# Altium PCB nanoDAP.PcbDoc
Units mm, origin at the board's own origin, x right, y up, seen from the top; angles counter-clockwise.
Board outline 70 x 40 mm, 2 copper layers (Top Layer, Bottom Layer); 25 components, 42 nets, 128 pads, 17 vias.
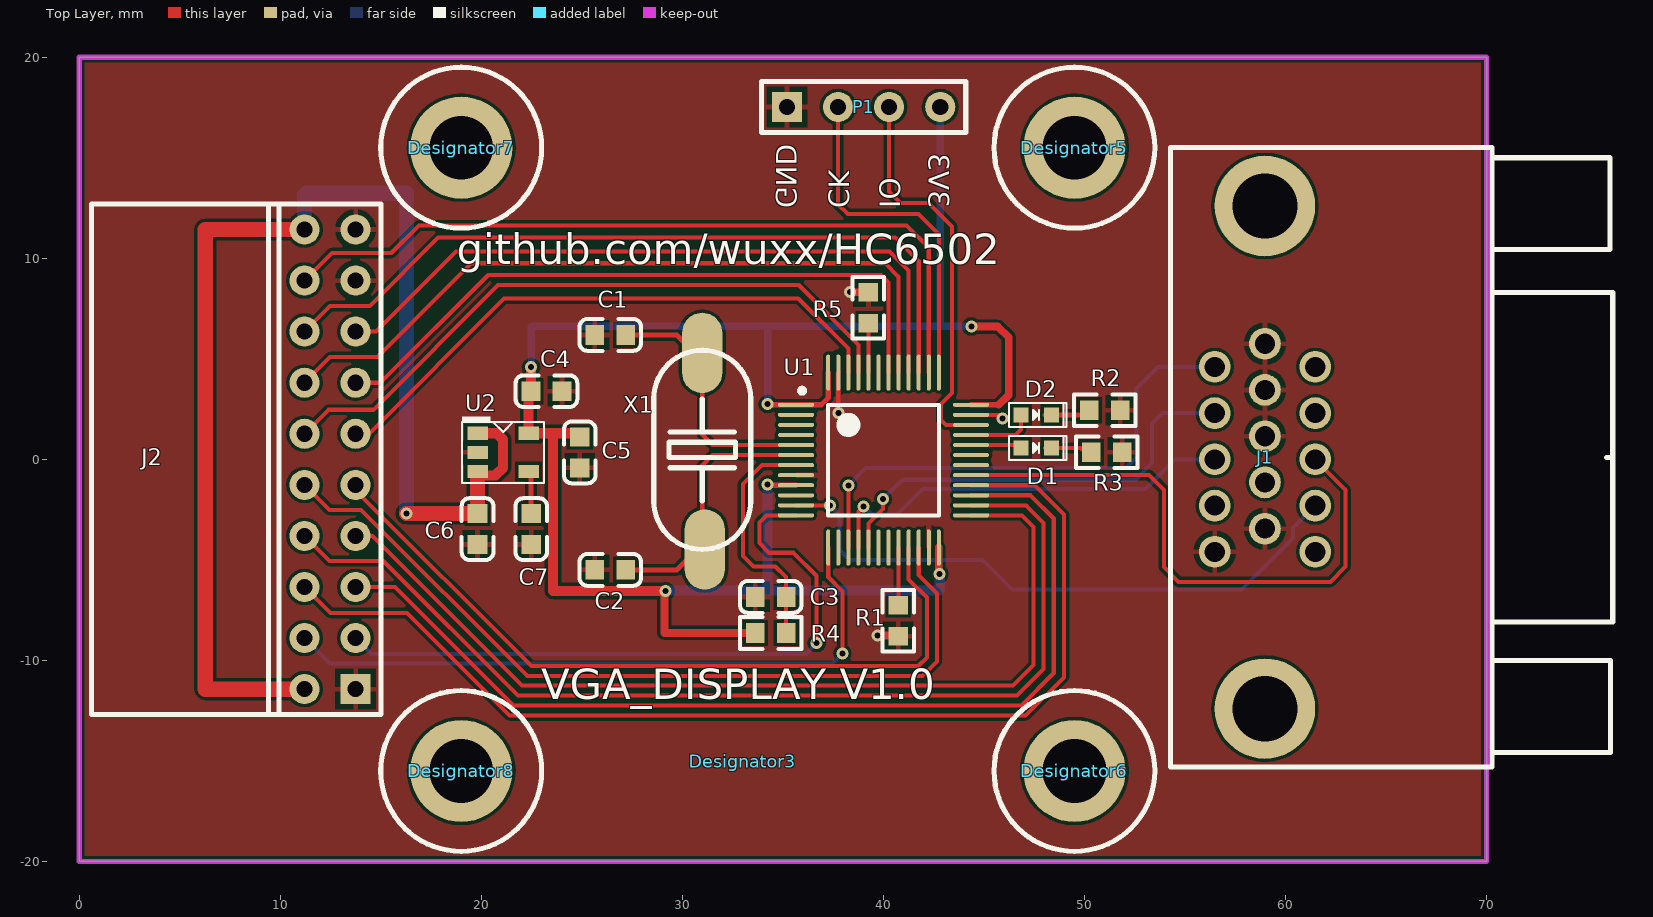
[diagram p0: Top Layer view]
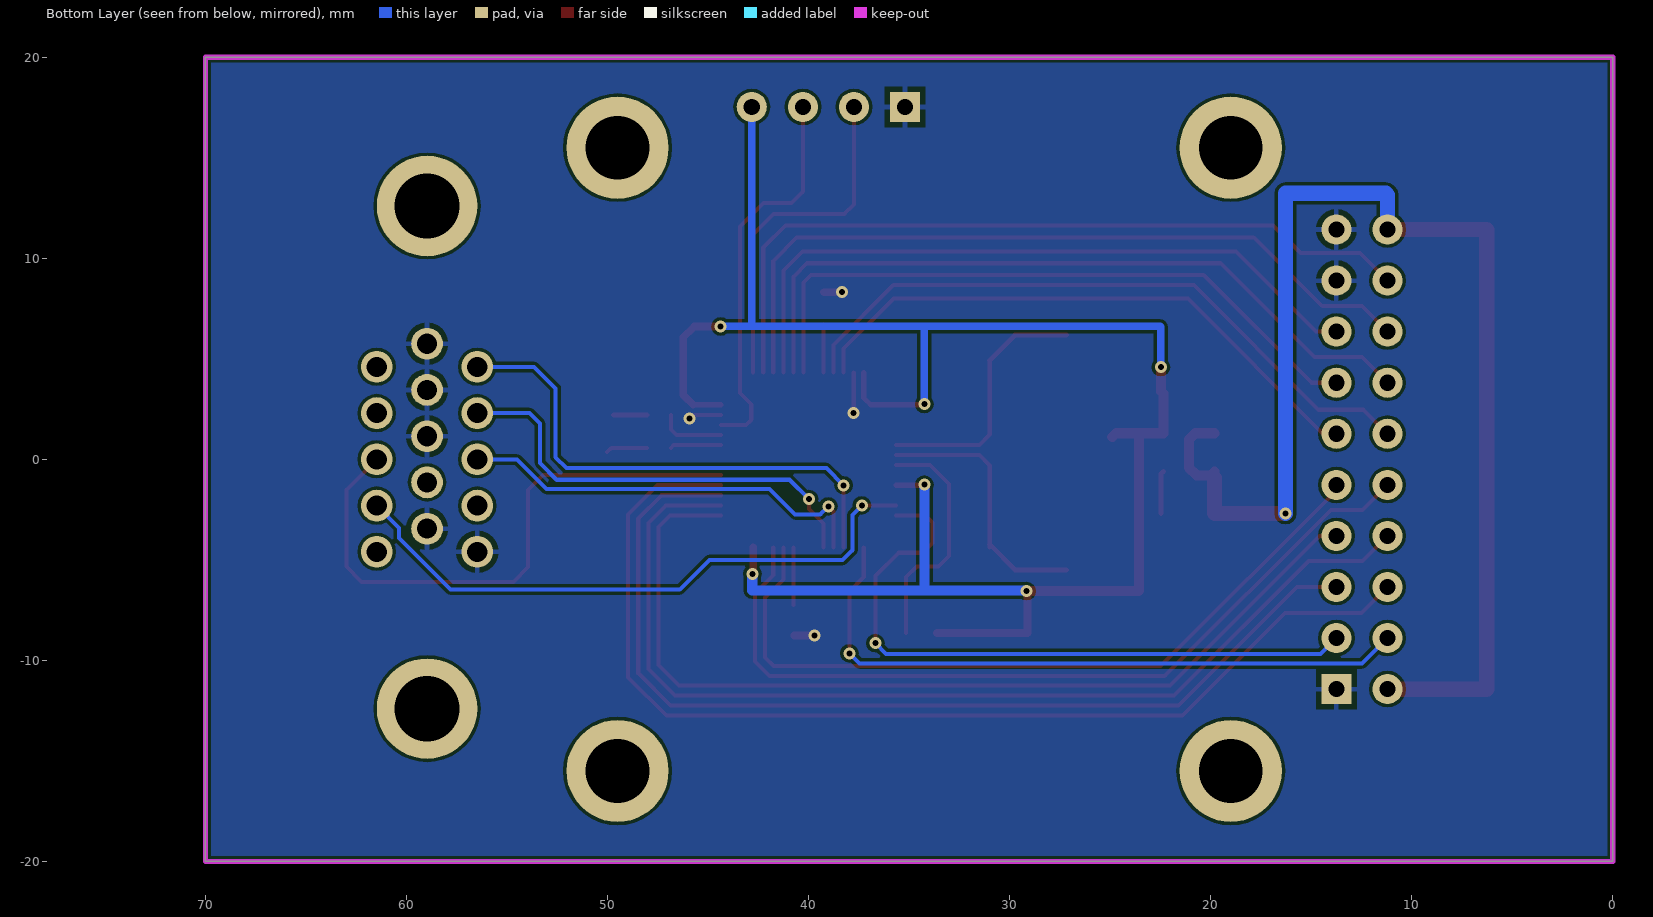
[diagram p1: Bottom Layer view, seen from below]
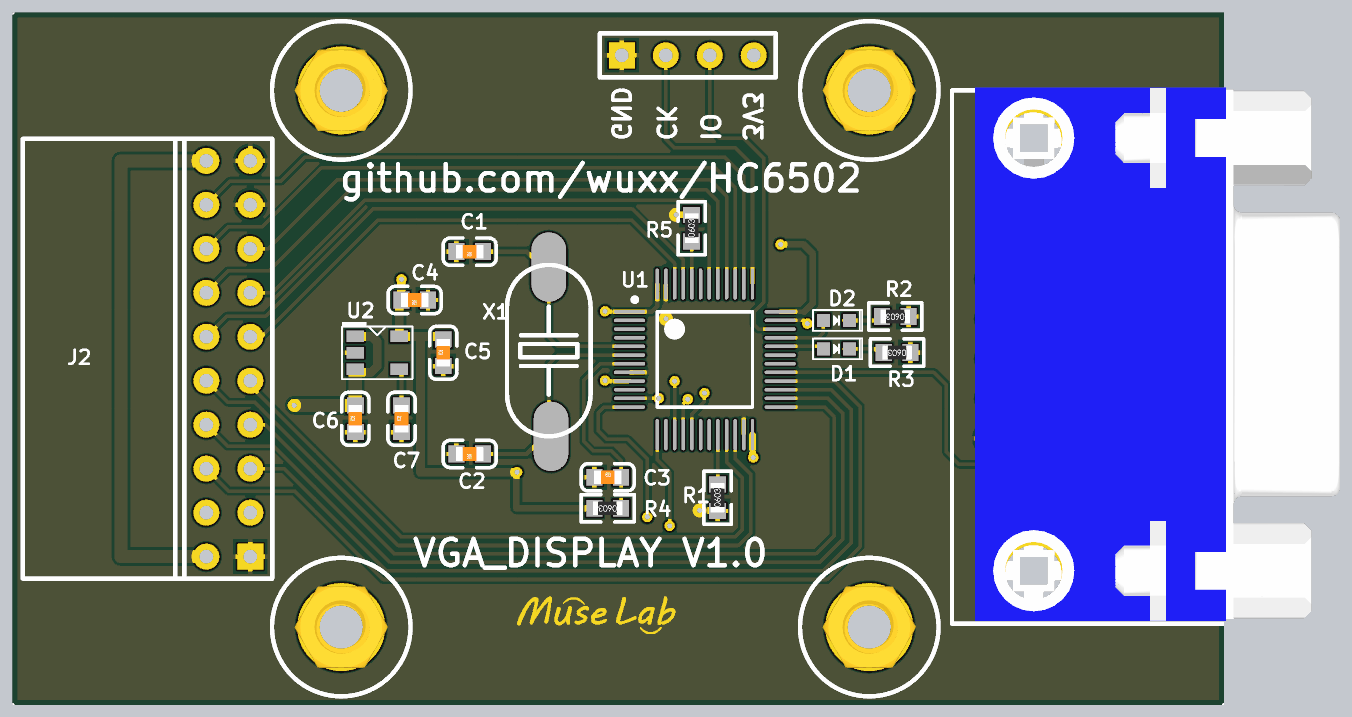
[diagram p2: 3D render of the assembled board from above, using the file's embedded part models]

## Layer stack, top to bottom
Top Solder: solder mask 0.0102, Solder Resist, Dk 3.5
Top Layer: signal copper 0.0356
Dielectric 1: dielectric 0.32, FR-4, Dk 4.8
Bottom Layer: signal copper 0.0356
Bottom Solder: solder mask 0.0102, Solder Resist, Dk 3.5

## Board outline
0,-20 70,-20 70,20 0,20

## Design rules (kind name [scope] priority, off if disabled: settings)
Clearance [All] p1: gap=0.152 ignorepadtopadclearanceinfootprint=FALSE
DiffPairsRouting [All] p1: maxlimit=0.254 minlimit=0.254 mostfreqgap=0.254 toplayer_minwidth=0.203 toplayer_maxwidth=0.381 toplayer_prefwidth=0.381 bottomlayer_minwidth=0.203 bottomlayer_maxwidth=0.381 bottomlayer_prefwidth=0.381 maxuncoupledlength=12.7
HoleSize [All] p1 off: absolutevalues=TRUE maxlimit=2.54 minlimit=0.025 maxpercent=80.000 minpercent=20.000
PolygonConnect [All] p1: thpad.connectstyle=Relief thpad.reliefconductorwidth=0.254 thpad.reliefentries=4 thpad.polygonreliefangle="90 Angle" thpad.airgapwidth=0.254 smdpad.connectstyle=Relief smdpad.reliefconductorwidth=0.254 smdpad.reliefentries=4 smdpad.polygonreliefangle="90 Angle" smdpad.airgapwidth=0.254 via.connectstyle=Direct via.reliefconductorwidth=0.254 via.reliefentries=4 via.polygonreliefangle="90 Angle" via.airgapwidth=0.254
RoutingVias [All] p1: holewidth=0.3 width=0.6 viastyle="Through Hole" minholewidth=0.3 minwidth=0.6 maxholewidth=0.3 maxwidth=0.6
SolderMaskExpansion [All] p1: expansion=0.102
Width [All] p1: maxlimit=2.54 minlimit=0.152 preferedwidth=0.254
28 further rules are at their usual default settings.

## Classes and differential pairs
component class nanoDAP: C1 C2 C3 C4 C5 C6 C7 D1 D2 J1 J2 P1 R1 R2 R3 R4 R5 U1 U2 X1

## Components (designator, comment, footprint, x,y, rotation, side; value= is the part's Value field where it differs from the comment)
C1 "C0603" 0603_C 26.416,6.185 r180 top value=20pF
C2 "C0603" 0603_C 26.416,-5.499 r180 top value=20pF
C3 "C0603" 0603_C 34.392,-6.845 r0 top value=0.1uF
C4 "1uf" 0603_C 23.241,3.391 r180 top value=1uF
C5 "104" 0603_C 24.892,0.343 r90 top value=0.1uF
C6 "1uf" 0603_C 19.812,-3.467 r90 top value=1uF
C7 "223" 0603_C 22.479,-3.467 r90 top
D1 "RED" 0603_LED 47.6,0.572 r0 top
D2 "BLUE" 0603_LED 47.6,2.21 r0 top
Designator3 "Comment" LOGO_MUSELAB 32.995,-15.011 r0 top
Designator5 "Comment" M3x4_L 49.5,15.5 r0 top
Designator6 "Comment" M3x4_L 49.5,-15.5 r0 top
Designator7 "Comment" M3x4_L 19,15.5 r0 top
Designator8 "Comment" M3x4_L 19,-15.5 r0 top
J1 "VGA_FEMALE" VGA15B 56.477,0 r270 top
J2 "IDC20" IDC20 12.477,0 r90 top
P1 "Header 4" HEADER_4x1 35.204,17.526 r0 top
R1 "R0603" 0603_R 40.742,-8.026 r90 top value=10K
R2 "R0603" 0603_R 51.003,2.438 r180 top value=10K
R3 "R0603" 0603_R 51.105,0.356 r180 top value=10K
R4 "R0603" 0603_R 34.392,-8.636 r180 top value=10K
R5 "R0603" 0603_R 39.243,7.544 r90 top value=10K
U1 "STM32F103C8T6" LQFP48_N 40.005,-0.038 r0 top locked
U2 "RT9193-33" SOT23-5 21.082,0.343 r90 top
X1 "XTAL" 49SMD 30.988,0.47 r270 top value=8MHz

## Footprints (in the part's own frame and the unit in brackets; to place one, negate y for a bottom-side part, rotate by r counter-clockwise, add the part's x,y. Pads: shape width x height; smd on the part's side, far side on the other; paste and mask are expansions set on the pad)
49SMD [mm]
  oval 4x2 smd: 1(-4.826,0) 2(4.953,0.127)
  silkscreen extent -4.95,-2.41 4.95,2.41
0603_C [mm]
  rect 0.93x0.98 smd: 1(-0.77,0) 2(0.77,0)
  silkscreen extent -1.53,-0.79 1.54,0.79, body extent -0.8,-0.4 0.8,0.4, height 0.3
0603_LED [mm]
  rect 0.75x0.75 smd: 1(-0.75,0) 2(0.75,0)
  silkscreen extent -1.35,-0.6 1.5,0.6
0603_R [mm]
  rect 0.93x0.98 smd: 1(-0.77,0) 2(0.77,0)
  silkscreen extent -1.53,-0.79 1.54,0.79, body extent -0.85,-0.4 0.85,0.4, height 0.56
HEADER_4x1 [mm]
  rect 1.5x1.5 hole 0.8: 1(0,0)
  round 1.5 hole 0.8: 2(2.54,0) 3(5.08,0) 4(7.62,0)
  silkscreen extent -1.27,-1.27 8.89,1.27
IDC20 [mm]
  rect 1.5x1.5 hole 0.8: 1(-11.43,-1.27)
  round 1.5 hole 0.8: 2(-11.43,1.27) 3(-8.89,-1.27) 4(-8.89,1.27) 5(-6.35,-1.27) 6(-6.35,1.27) 7(-3.81,-1.27) 8(-3.81,1.27) 9(-1.27,-1.27) 10(-1.27,1.27) 11(1.27,-1.27) 12(1.27,1.27) 13(3.81,-1.27) 14(3.81,1.27) 15(6.35,-1.27) 16(6.35,1.27) 17(8.89,-1.27) 18(8.89,1.27) 19(11.43,-1.27) 20(11.43,1.27)
  silkscreen extent -12.7,-2.54 12.7,11.87
LOGO_MUSELAB [mm]
LQFP48_N [mm]
  oval 1.8x0.2 smd: 1(-4.35,2.75) 2(-4.35,2.25) 3(-4.35,1.75) 4(-4.35,1.25) 5(-4.35,0.75) 6(-4.35,0.25) 7(-4.35,-0.25) 8(-4.35,-0.75) 9(-4.35,-1.25) 10(-4.35,-1.75) 11(-4.35,-2.25) 12(-4.35,-2.75) 25(4.35,-2.75) 26(4.35,-2.25) 27(4.35,-1.75) 28(4.35,-1.25) 29(4.35,-0.75) 30(4.35,-0.25) 31(4.35,0.25) 32(4.35,0.75) 33(4.35,1.25) 34(4.35,1.75) 35(4.35,2.25) 36(4.35,2.75)
  oval 0.2x1.8 smd: 13(-2.75,-4.35) 14(-2.25,-4.35) 15(-1.75,-4.35) 16(-1.25,-4.35) 17(-0.75,-4.35) 18(-0.25,-4.35) 19(0.25,-4.35) 20(0.75,-4.35) 21(1.25,-4.35) 22(1.75,-4.35) 23(2.25,-4.35) 24(2.75,-4.35) 37(2.75,4.35) 38(2.25,4.35) 39(1.75,4.35) 40(1.25,4.35) 41(0.75,4.35) 42(0.25,4.35) 43(-0.25,4.35) 44(-0.75,4.35) 45(-1.25,4.35) 46(-1.75,4.35) 47(-2.25,4.35) 48(-2.75,4.35)
  silkscreen extent -4.17,-2.75 2.75,3.57
M3x4_L [mm] "M3铜柱，长：4mm"
  round 5.08 hole 3.175: 1(0,0)
  silkscreen extent -4,-4 4,4, body extent -2.7,-2.35 2.7,2.35, height 4.05
SOT23-5 [mil]
  rect 26x40 smd: 1(37.4,50) 2(0,50) 3(-37.4,50) 4(-37.4,-50) 5(37.4,-50)
  silkscreen extent -60,-80 70,80
VGA15B [mm] "15针通讯接口"
  round 1.58 hole 1: 1(-4.6,0) 2(-2.3,0) 3(0,0) 4(2.3,0) 5(4.6,0) 6(-5.75,2.5) 7(-3.45,2.5) 8(-1.15,2.5) 9(1.15,2.5) 10(3.45,2.5) 11(-4.6,5) 12(-2.3,5) 13(0,5) 14(2.3,5) 15(4.6,5)
  round 5 hole 3.25: 16(-12.6,2.5) 17(12.4,2.5)
  silkscreen extent -15.5,-2.2 15.3,19.8, body extent -15.66,-0.87 15.15,20.23, height 12.77

## Part data
C1 C2 C3: "Capacitor", LatestRevisionDate=17-Jul-2002, LatestRevisionNote="Re-released for DXP Platform.", PackageDescription="Radial Cap, Thru-Hole; 2 Leads; 0.3 in Pin Spacing", PackageReference=RAD-0.3, Published=8-Jun-2000, Publisher="Altium Limited"
C4 C5 C6 C7: library part CAP, "Capacitor"
D1 D2: library part D0603, "Typical RED, GREEN, YELLOW, AMBER GaAs LED", LatestRevisionDate=17-Jul-2002, LatestRevisionNote="Re-released for DXP Platform.", PackageDescription="SM LED; 2 Flat Leads", PackageReference=3.2X1.6X1.1, PackageVersion=Feb-2002, Published=8-Jun-2000, Publisher="Altium Limited"
P1: "Header, 4-Pin", LatestRevisionDate=17-Jul-2002, LatestRevisionNote="Re-released for DXP Platform.", Publisher="Altium Limited"
R1 R2 R3 R4 R5: "Resistor", LatestRevisionDate=17-Jul-2002, LatestRevisionNote="Re-released for DXP Platform.", PackageDescription="Axial Device, Thru-Hole; 2 Leads; 0.3 in Pin Spacing", PackageReference=AXIAL-0.3, Published=8-Jun-2000, Publisher="Altium Limited"
U1: "LowPower MCU"

## Via types
v1: diameter 0.6, hole 0.3, Top Layer to Bottom Layer, 17 vias

## Nets (pads, with @x,y where several pads share a name; then routed paths per layer and width w, separated by ;. In a path a pad name is that pad's centre, name@x,y a point inside that pad or via, vN(x,y) a via of type N, cw(c..) or ccw(c..) an arc to the next point about the centre after c; other vN are vias at no path point)
3V3: C4.2 C5.2 P1.4 R4.2 U1.1 U1.9 U1.24 U1.36 U1.48 U2.5 | length 98.5
  Top Layer w0.254: v1(34.239,-1.257) 34.27,-1.288 U1.9 ; v1@34.27,2.712 U1.1 36.913,2.712 37.255,3.054 U1.48 ; v1@42.755,-5.658 v1(42.799,-5.702) ; U1.36 45.739,2.712
  Top Layer w0.381: v1(29.159,-6.553) 29.108,-6.604 29.108,-8.636 R4.2 ; v1@42.755,-5.658 U1.24 ; v1(44.374,6.604) 45.695,6.604 46.228,6.071 46.228,3.2 45.739,2.712
  Top Layer w0.508: v1(22.479,4.585) 22.471,4.577 C4.2 22.352,3.272 U2.5 23.571,1.293 ; C5.2 24.712,1.293 23.571,1.293 ; v1(29.159,-6.553) 23.571,-6.553 23.571,1.293
  Bottom Layer w0.381: v1(22.479,4.585) 22.479,6.579 22.517,6.617 44.361,6.617 v1(44.374,6.604) ; v1(34.239,2.743) 34.239,6.566 ; 42.824,6.617 P1.4
  Bottom Layer w0.508: v1@29.185,-6.523 34.239,-6.523 ; v1(34.239,-1.257) 34.239,-6.523 ; v1(42.799,-5.702) 42.799,-6.504 42.818,-6.523 34.239,-6.523
5V: C6.2 J2.2 J2.20 U2.1 U2.3 | length 65.1
  Top Layer w0.508: U2.3 20.005,-0.8 20.701,-0.8 21.082,-0.419 21.082,0.978 20.767,1.293 U2.1
  Top Layer w0.762: J2.2 6.274,-11.43 6.274,11.43 J2.20 ; v1(16.281,-2.692) 16.286,-2.697 C6.2 U2.3@19.812,-0.927
  Bottom Layer w0.762: J2.20 11.207,13.15 11.284,13.227 16.281,13.227 v1(16.281,-2.692)
BOOT0: R5.1 U1.44 | length 2.4
  Top Layer w0.203: U1.44 R5.1@39.255,6.694
BOOT1: R1.2 U1.20 | length 2.9
  Top Layer w0.203: R1.2@40.755,-7.243 U1.20
D_SWCLK: P1.2 U1.37 | length 17.3
  Top Layer w0.203: P1.2 37.744,12.675 38.227,12.192 41.739,12.192 42.755,11.176 U1.37
D_SWDIO: P1.3 U1.34 | length 19.5
  Top Layer w0.203: P1.3 40.284,13.31 40.843,12.751 42.24,12.751 43.409,11.582 43.409,3.288 42.85,2.73 42.85,1.968 43.106,1.712 U1.34
GND: C1.2 C2.2 C3.1 C4.1 C5.1 C6.1 C7.1 J1.5 J1.6 J1.7 J1.8 J1.10 J2.1 J2.17 J2.19 P1.1 R1.1 R2.1 R3.1 R5.2 U1.8 U1.23 U1.35 U1.47 U2.2 | length 5.6
  Top Layer w0.203: v1(37.755,2.311) U1.47 ; R1.1@40.708,-8.763 R1.1 ; U1.35 45.743,2.212 v1(45.923,2.032)
  Top Layer w0.381: v1@38.329,8.306 v1(38.337,8.314) R5.2 ; v1(39.7,-8.763) R1.1@40.708,-8.763
LED_CON: D2.1 U1.33 | length 3.3
  Top Layer w0.203: U1.33 46.576,1.212 46.85,1.485 D2.1
LED_RUN: D1.1 U1.32 | length 2.6
  Top Layer w0.203: U1.32 46.709,0.712 D1.1
NetC1_1: C1.1 U1.5 X1.1 | length 12.9
  Top Layer w0.203: X1.1@30.988,4.915 30.988,1.232 31.508,0.712 U1.5
  Top Layer w0.254: C1.1 29.718,6.185 X1.1@30.988,4.915
NetC2_1: C2.1 U1.6 X1.2 | length 13.3
  Top Layer w0.203: X1.2@30.988,-4.372 30.988,-0.308 31.508,0.212 U1.6
  Top Layer w0.254: C2.1 29.718,-5.499 X1.2@30.988,-4.229
NetC3_2: C3.2 R4.1 U1.7 | length 11.9
  Top Layer w0.203: R4.1 35.162,-5.863 34.62,-5.321 33.541,-5.321 33.02,-4.801 33.02,-1.232 33.964,-0.288 U1.7
NetC7_2: C7.2 U2.4 | length 2.1
  Top Layer w0.254: U2.4 22.479,-0.734 C7.2
NetD1_2: D1.2 R3.2 | length 2.1
  Top Layer w0.203: D1.2@48.045,0.572 49.814,0.572 R3.2@50.03,0.356
NetD2_2: D2.2 R2.2 | length 1.7
  Top Layer w0.254: D2.2@48.045,2.21 49.7,2.21
PA0: U1.10
PA1: J1.14 U1.11 | length 30.6
  Top Layer w0.203: U1.11 v1(37.346,-2.288)
  Bottom Layer w0.203: v1(37.346,-2.288) 37.821,-2.762 37.821,-4.521 38.303,-5.004 44.933,-5.004 46.406,-6.477 57.81,-6.477 60.371,-3.917 60.371,-3.406 J1.14
PA4: U1.14
PA5: J1.1 U1.15 | length 25.8
  Top Layer w0.203: U1.15 v1(38.255,-1.295)
  Bottom Layer w0.203: v1(38.255,-1.295) 39.119,-0.432 52.045,-0.432 52.578,0.102 52.578,3.531 53.647,4.6 J1.1
PA6: J1.3 U1.16 | length 20.9
  Top Layer w0.203: U1.16 38.755,-2.596 v1(39.014,-2.337)
  Bottom Layer w0.203: v1(39.014,-2.337) 39.421,-2.743 40.665,-2.743 41.935,-1.473 53.035,-1.473 54.508,0 J1.3
PA7: J1.2 U1.17 | length 22.1
  Top Layer w0.203: U1.17 39.255,-3.188 39.98,-2.464 v1(39.98,-1.981)
  Bottom Layer w0.203: v1(39.98,-1.981) 40.945,-1.016 52.527,-1.016 53.365,-0.178 53.365,1.778 53.887,2.3 J1.2
PA8: J1.13 U1.29 | length 29.4
  Top Layer w0.203: U1.29 53.214,-0.788 53.95,-1.524 53.95,-5.359 54.686,-6.096 62.23,-6.096 62.992,-5.334 62.992,-1.515 J1.13
PA9: U1.30
PA10: U1.31
PA15: J2.18 U1.38 | length 38.9
  Top Layer w0.203: J2.18 12.579,10.262 15.519,10.262 16.891,11.633 41.148,11.633 42.255,10.526 U1.38
PB0: U1.18
PB1: U1.19
PB3: J2.16 U1.39 | length 38.5
  Top Layer w0.203: J2.16 12.477,7.62 14.453,7.62 17.856,11.024 40.589,11.024 41.755,9.858 U1.39
PB4: J2.15 U1.40 | length 34.6
  Top Layer w0.203: J2.15 14.757,6.35 18.745,10.338 40.31,10.338 41.255,9.393 U1.40
PB5: J2.14 U1.41 | length 37.1
  Top Layer w0.203: J2.14 12.477,5.08 14.834,5.08 19.507,9.754 40.081,9.754 40.755,9.08 U1.41
PB6: J2.13 U1.42 | length 33.4
  Top Layer w0.203: J2.13 14.986,3.81 20.345,9.169 39.878,9.169 40.255,8.792 U1.42
PB7: U1.43
PB8: J2.12 U1.45 | length 33.2
  Top Layer w0.203: J2.12 12.401,2.464 14.63,2.464 20.828,8.661 35.789,8.661 38.755,5.695 U1.45
PB9: J2.11 U1.46 | length 29.5
  Top Layer w0.203: J2.11 14.402,1.27 21.133,8.001 35.763,8.001 38.255,5.509 U1.46
PB10: J2.9 U1.21 | length 38.3
  Top Layer w0.203: J2.9 13.747,-1.541 22.493,-10.287 41.732,-10.287 42.164,-9.855 42.164,-6.879 41.255,-5.97 U1.21
PB11: J2.10 U1.22 | length 41.7
  Top Layer w0.203: J2.10 12.452,-2.515 14.014,-2.515 22.286,-10.787 41.939,-10.787 42.664,-10.062 42.664,-6.672 41.755,-5.763 U1.22
PB12: J2.7 U1.25 | length 47.4
  Top Layer w0.203: J2.7 14.585,-3.81 22.026,-11.251 46.445,-11.251 47.471,-10.224 47.471,-3.365 46.895,-2.788 U1.25
PB13: J2.8 U1.26 | length 51.9
  Top Layer w0.203: J2.8 12.452,-5.055 15.123,-5.055 21.819,-11.751 46.652,-11.751 47.971,-10.432 47.971,-3.157 47.102,-2.288 U1.26
PB14: J2.5 U1.27 | length 50.1
  Top Layer w0.203: J2.5 15.711,-6.35 21.612,-12.251 46.859,-12.251 48.471,-10.639 48.471,-2.95 47.309,-1.788 U1.27
PB15: J2.6 U1.28 | length 54.5
  Top Layer w0.203: J2.6 12.502,-7.645 16.299,-7.645 21.405,-12.751 47.066,-12.751 48.971,-10.846 48.971,-2.743 47.516,-1.288 U1.28
UART2_RX: J2.4 U1.13 | length 33.1
  Top Layer w0.203: U1.13 37.255,-5.861 37.973,-6.579 v1(37.973,-9.652)
  Bottom Layer w0.203: J2.4 12.477,-10.16 37.465,-10.16 v1(37.973,-9.652)
UART2_TX: J2.3 U1.12 | length 33.3
  Top Layer w0.203: U1.12 34.194,-2.788 33.833,-3.15 33.833,-4.166 34.315,-4.648 35.535,-4.648 36.678,-5.791 v1(36.678,-9.144)
  Bottom Layer w0.203: J2.3 14.534,-9.677 36.144,-9.677 v1(36.678,-9.144)
pads on no net: Designator5.1 Designator6.1 Designator7.1 Designator8.1 J1.4 J1.9 J1.11 J1.12 J1.15 J1.16 J1.17 U1.2 U1.3 U1.4

## Polygon pours and split planes (outlines as drawn)
GND on Top Layer "GND_L01_P000" (solid, remove dead copper, pour order 0): 0,-20 0,20 70,20 70,-20
GND on Bottom Layer "GND_L02_P002" (solid, remove dead copper, pour order 2): 0,-20 0,20 70,20 70,-20

## Keep-outs
Keep-Out Layer:
  the board outline again, w0.254

## Silkscreen, mask and mechanical layers (free items; w line width, h text height)
Top Overlay:
  text "GND" at 34.671,12.484 h1.02 r270
  text "CK" at 37.287,12.484 h1.02 r270
  text "IO" at 39.827,12.484 h1.02 r270
  text "3V3" at 42.266,12.484 h1.02 r270
  text "github.com/wuxx/HC6502" at 18.771,9.703 h1.52
  text "VGA_DISPLAY V1.0" at 22.987,-11.938 h1.52

## Dimensions
0,20 to 0,-20 on Top Overlay
0,-20 to 70,-20 on Top Overlay